# EAGLE board cpio_v0.1 (EAGLE 7.5.0)

Size 147.66 x 80 mm. Coordinates in mm from the lower left corner, seen from the top.
Outline: 112.66,0 147.66,0 147.66,80 47.66,80 47.66,30
Outline: 47.66,30 112.66,30 112.66,0
Outline: 112.66,0 47.66,0 47.66,30
Copper layers (1*16): Top 0.035mm / dielectric 1.5mm / Bottom 0.035mm
Design rules "default": minimum track width 10mil, minimum drill 0.6mm, track to track 8mil, track to pad 8mil, pad to pad 8mil, via to via 8mil, smd to smd 8mil, copper to edge 40mil, drill to drill 8mil, minimum pad ring 10mil, minimum via ring 8mil, stop-mask expansion 4mil, vias tented up to drill 0mil, thermal gap 10mil

## Footprints (pad centres in the part's own frame; a part is rotated, then mirrored left to right if it is on the bottom)
TFSOP-10 = smd 0.3 x 1.45: 1 -1,-2.2; 2 -0.5,-2.2; 3 0,-2.2; 4 0.5,-2.2; 5 1,-2.2; 6 1,2.2; 7 0.5,2.2; 8 0,2.2; 9 -0.5,2.2; 10 -1,2.2
BEEPER = drill 1: + -3.81,0; - 3.81,0
0805 = smd 0.8 x 1.2: 1 -0.9,0; 2 0.9,0
SOD-123FL = smd 0.91 x 1.22: A 1.637,0; C -1.637,0
XH-A-2 = drill 1.1: 1 1.25,0; 2 -1.25,0
SOT23-3 = smd 0.8 x 0.9: 1 -0.95,-1; 2 0.95,-1; 3 0,1.1
LED-1206 = smd 1.2 x 1.4: A -1.5,0; C 1.5,0
BUTTON = drill 1.1: 1 -2.5,-2.5; 2 2.5,-2.5; 3 -2.5,2.5; 4 2.5,2.5
PJ-047A = drill 2.236: 1 6.3,-3.3; 2 4.1,0; 3 6.3,3.3 | drill 2.53: CASE0 -1.1,3.7; CASE1 -1.1,-3.7 | hole 2.4: 0,0
WS2812B = smd 1.5 x 0.9: 1-VDD 2.45,-1.65; 2-DOUT 2.45,1.65; 3-GND -2.45,1.65; 4-DIN -2.45,-1.65
2X20 = drill 1.016 pad 1.651: 1 -24.13,-1.27; 2 -24.13,1.27; 3 -21.59,-1.27; 4 -21.59,1.27; 5 -19.05,-1.27; 6 -19.05,1.27; 7 -16.51,-1.27; 8 -16.51,1.27; 9 -13.97,-1.27; 10 -13.97,1.27; 11 -11.43,-1.27; 12 -11.43,1.27; 13 -8.89,-1.27; 14 -8.89,1.27; 15 -6.35,-1.27; 16 -6.35,1.27; 17 -3.81,-1.27; 18 -3.81,1.27; 19 -1.27,-1.27; 20 -1.27,1.27; 21 1.27,-1.27; 22 1.27,1.27; 23 3.81,-1.27; 24 3.81,1.27; 25 6.35,-1.27; 26 6.35,1.27; 27 8.89,-1.27; 28 8.89,1.27; 29 11.43,-1.27; 30 11.43,1.27; 31 13.97,-1.27; 32 13.97,1.27; 33 16.51,-1.27; 34 16.51,1.27; 35 19.05,-1.27; 36 19.05,1.27; 37 21.59,-1.27; 38 21.59,1.27; 39 24.13,-1.27; 40 24.13,1.27
XH-A-3 = drill 1.1: 1 2.5,0; 2 0,0; 3 -2.5,0
XH-A-4 = drill 1.1: 1 3.75,0; 2 1.25,0; 3 -1.25,0; 4 -3.75,0
SOT23-5 = smd 0.55 x 1.2: 1 -0.95,-1.3; 2 0,-1.3; 3 0.95,-1.3; 4 0.95,1.3; 5 -0.95,1.3
SOT23-6 = smd 0.63 x 0.8: 1 -0.95,-1.2; 2 0,-1.2; 3 0.95,-1.2; 4 0.95,1.2; 5 0,1.2; 6 -0.95,1.2
POWERSSO-24 = smd 0.6 x 1: 1 -4.4,-4.825; 2 -3.6,-4.825; 3 -2.8,-4.825; 4 -2,-4.825; 5 -1.2,-4.825; 6 -0.4,-4.825; 7 0.4,-4.825; 8 1.2,-4.825; 9 2,-4.825; 10 2.8,-4.825; 11 3.6,-4.825; 12 4.4,-4.825; 13 4.4,4.825; 14 3.6,4.825; 15 2.8,4.825; 16 2,4.825; 17 1.2,4.825; 18 0.4,4.825; 19 -0.4,4.825; 20 -1.2,4.825; 21 -2,4.825; 22 -2.8,4.825; 23 -3.6,4.825; 24 -4.4,4.825 | smd 7.1 x 4.7: PAD 0,0
TSSOP-14 = smd 1.6 x 0.35: 1 -2.8,1.9; 2 -2.8,1.25; 3 -2.8,0.6; 4 -2.8,-0.05; 5 -2.8,-0.7; 6 -2.8,-1.35; 7 -2.8,-2; 8 2.8,-1.95; 9 2.8,-1.3; 10 2.8,-0.65; 11 2.8,0; 12 2.8,0.65; 13 2.8,1.3; 14 2.8,1.95
SOT-363 = smd 0.5 x 0.5: 1 -0.9,0.75; 3 -0.9,-0.75; 4 0.9,-0.75; 6 0.9,0.75 | smd 0.5 x 0.4: 2 -0.9,0; 5 0.9,0

## Placement (x,y rotation side)
ADC  ADS1115  [TFSOP-10]  32.42,36.83 0 top
BEEP  BEEPER  [BEEPER]  56.55,40.64 0 top
C_ADC  100n  [0805]  24.8,63.5 0 top
C_ADC_B  100n  [0805]  28.61,59.69 0 top
C_ADC_PH  100n  [0805]  -22.18,55.88 0 top  (outside the outline)
C_CUR_FILT  100n  [0805]  -6.95,55.88 0 top  (outside the outline)
C_IO1  100n  [0805]  20.99,63.5 0 top
C_LDO3.3_1  1u  [0805]  -12.02,55.88 0 top  (outside the outline)
C_LDO3.3_2  1u  [0805]  -17.1,55.88 0 top  (outside the outline)
C_LVL  100n  [0805]  17.18,63.5 0 top
C_MUX  100n  [0805]  28.61,63.5 0 top
C_RL_0  100n  [0805]  -17.1,59.69 0 top  (outside the outline)
C_RL_2  100n  [0805]  -20.91,59.69 0 top  (outside the outline)
C_RL_12  100n  [0805]  5.76,59.69 0 top
C_SD_1  4.7u  [0805]  -5.68,59.69 0 top  (outside the outline)
C_SD_2  10u  [0805]  -9.48,59.69 0 top  (outside the outline)
C_SD_3  10n  [0805]  -13.3,59.69 0 top  (outside the outline)
C_SW  100n  [0805]  13.38,63.5 0 top
C_U_FILT  100n  [0805]  20.99,59.69 0 top
DIODE_SD  DB2X41100L  [SOD-123FL]  -3.13,49.53 0 top
HEAT_0  XH-A-2  [XH-A-2]  54.02,7.62 0 top
HEAT_1  XH-A-2  [XH-A-2]  64.17,7.62 0 top
HEAT_2  XH-A-2  [XH-A-2]  74.34,7.62 0 top
HEAT_3  XH-A-2  [XH-A-2]  84.5,7.62 0 top
L_SD_1  2.2u  [0805]  32.42,63.5 0 top
LDO  AP7333  [SOT23-3]  5.76,48.26 0 top
LED_PWR_3.3V  [LED-1206]  97.19,2.54 90 top
LED_PWR_5V  [LED-1206]  94.66,2.54 90 top
LED_PWR_12V  [LED-1206]  92.12,2.54 90 top
LED_RP  [LED-1206]  99.73,2.54 90 top
PUSH1  BUTTON  [BUTTON]  106.09,6.35 0 top
PWR_JACK  PJ-047A  [PJ-047A]  108.62,17.78 180 top
R_1WIRE  4.7k  [0805]  17.18,59.69 0 top
R_BEP  [0805]  4.48,66.04 0 top
R_BRIGHT  [0805]  12.1,66.04 0 top
R_CM_LOAD  100  [0805]  8.3,55.88 0 top
R_CM_LOAD1  100  [0805]  18.45,55.88 0 top
R_CM_LOAD2  100  [0805]  13.38,55.88 0 top
R_CM_SENS  1m  [0805]  3.21,55.88 0 top
R_HSS_GND  1k  [0805]  -1.87,55.88 0 top
R_HSS_PROT_0  10k  [0805]  -14.56,49.53 0 top  (outside the outline)
R_HSS_PROT_1  10k  [0805]  -20.91,49.53 0 top  (outside the outline)
R_HSS_PROT_2  10k  [0805]  29.88,55.88 0 top
R_HSS_PROT_3  10k  [0805]  23.54,55.88 0 top
R_HSS_SD  10k  [0805]  32.42,59.69 0 top
R_I2C_0  10k  [0805]  1.95,59.69 0 top
R_I2C_1  10k  [0805]  -1.87,59.69 0 top
R_LED_3.3V  [0805]  26.07,66.04 0 top
R_LED_5V  [0805]  8.3,66.04 0 top
R_LED_12V  [0805]  20.99,66.04 0 top
R_LED_RP  [0805]  15.91,66.04 0 top
R_PH  10k  [0805]  9.56,63.5 0 top
R_PUSHBUT1  [0805]  -20.91,62.23 0 top  (outside the outline)
R_PUSHBUT2  [0805]  31.15,66.04 0 top
R_SD_1B  82k  [0805]  13.38,59.69 0 top
R_SD_2A  15k  [0805]  9.56,59.69 0 top
R_SD_EN  10k  [0805]  24.8,59.69 0 top
RL_HEAT_0  WS2812B5050  [WS2812B]  84.5,2.54 0 top
RL_HEAT_1  WS2812B5050  [WS2812B]  74.34,2.54 0 top
RL_HEAT_2  WS2812B5050  [WS2812B]  64.17,2.54 0 top
RL_HEAT_3  WS2812B5050  [WS2812B]  54.02,2.54 0 top
RP_HEAD  M20X2  [2X20]  80.16,26.5 0 top
SENS_BRIGHT  XH-A-3  [XH-A-3]  75.61,20.32 0 top
SENS_HUM_0  XH-A-4  [XH-A-4]  54.02,20.32 0 top
SENS_HUM_1  XH-A-4  [XH-A-4]  87.03,20.32 0 top
SENS_I  INA139  [SOT23-5]  9.56,49.53 0 top
SENS_PH  XH-A-3  [XH-A-3]  65.44,20.32 0 top
SENS_TEMP_0  XH-A-3  [XH-A-3]  54.02,13.97 0 top
SENS_TEMP_1  XH-A-3  [XH-A-3]  64.17,13.97 0 top
SENS_TEMP_2  XH-A-3  [XH-A-3]  74.34,13.97 0 top
SENS_TEMP_3  XH-A-3  [XH-A-3]  84.5,13.97 0 top
STP_DN  AOZ1280  [SOT23-6]  1.95,49.53 0 top
SWT_HEAT  VNQ5E160K-E  [POWERSSO-24]  94.66,12.7 0 bottom
SWT_SENS  74CBTLV3125  [TSSOP-14]  15.91,49.53 0 top
U$1  74LVC  [SOT-363]  0.67,66.04 0 top
U$2  DB2X41100L  [SOD-123FL]  -8.22,49.53 0 top  (outside the outline)

## Library data of the parts
ADC BEEP DIODE_SD HEAT_0 HEAT_1-HEAT_3 LDO PUSH1 PWR_JACK SENS_BRIGHT SENS_HUM_0 SENS_HUM_1 SENS_I SENS_PH SENS_TEMP_0 SENS_TEMP_1-SENS_TEMP_3 STP_DN SWT_HEAT SWT_SENS U$1 U$2 = cpio
C_ADC C_ADC_B C_ADC_PH C_CUR_FILT C_IO1 C_LDO3.3_1 C_LDO3.3_2 C_LVL C_MUX C_RL_0 C_RL_2 C_RL_12 C_SD_1-C_SD_3 C_SW C_U_FILT L_SD_1 R_1WIRE R_BEP R_BRIGHT R_CM_LOAD R_CM_LOAD1 R_CM_LOAD2 R_CM_SENS R_HSS_GND R_HSS_PROT_0 R_HSS_PROT_1-R_HSS_PROT_3 R_HSS_SD R_I2C_0 R_I2C_1 R_LED_3.3V R_LED_5V R_LED_12V R_LED_RP R_PH R_PUSHBUT1 R_PUSHBUT2 R_SD_1B R_SD_2A R_SD_EN = SparkFun-Passives
LED_PWR_3.3V LED_PWR_5V LED_PWR_12V LED_RP = SparkFun-LED
RL_HEAT_0 RL_HEAT_1-RL_HEAT_3 = adafruit
RP_HEAD = SparkFun-Connectors

## Nets
1WIRE: SENS_TEMP_0.2 SENS_TEMP_1.2 SENS_TEMP_2.2 SENS_TEMP_3.2
3.3V: ADC.8 C_ADC.2 C_IO1.1 C_LDO3.3_2.1 LDO.2 R_1WIRE.2 R_BEP.2 R_HSS_SD.2 R_I2C_0.2 R_I2C_1.2 R_LED_3.3V.2 R_PUSHBUT1.2 SENS_BRIGHT.1 SENS_HUM_0.1 SENS_HUM_1.1 SENS_PH.1 SWT_SENS.2 SWT_SENS.5 SWT_SENS.9 SWT_SENS.12 SWT_SENS.14 U$1.1 U$1.5
3.3V1: C_MUX.2
3.3V2: C_SW.2
3.3V3: C_LVL.2
5V: C_LDO3.3_1.1 C_RL_0.1 C_RL_2.1 C_SD_2.1 L_SD_1.2 LDO.1 R_LED_5V.2 R_SD_1B.2 RL_HEAT_0.1-VDD RL_HEAT_1.1-VDD RL_HEAT_2.1-VDD RL_HEAT_3.1-VDD RP_HEAD.2 RP_HEAD.4 U$1.6
12V: C_SD_1.1 R_CM_LOAD1.2 R_CM_SENS.2 R_LED_12V.2 R_SD_EN.2 SENS_I.4 STP_DN.5 SWT_HEAT.1 SWT_HEAT.12
+3V3: SENS_I.5
ADC_BRIGHT: ADC.6 C_ADC_B.1 R_BRIGHT.1
ADC_CUR: ADC.4 C_CUR_FILT.1 R_CM_LOAD.2 SENS_I.1
ADC_PH: ADC.7 C_ADC_PH.1 R_PH.1
ADC_U: ADC.5 C_U_FILT.1 R_CM_LOAD1.1 R_CM_LOAD2.2
GND: ADC.1 ADC.3 C_ADC.1 C_ADC_B.2 C_ADC_PH.2 C_IO1.2 C_LDO3.3_1.2 C_LDO3.3_2.2 C_LVL.1 C_MUX.1 C_RL_0.2 C_RL_2.2 C_RL_12.2 C_SD_1.2 C_SD_2.2 C_SW.1 C_U_FILT.2 DIODE_SD.A HEAT_0.2 HEAT_1.2 HEAT_2.2 HEAT_3.2 LDO.3 LED_PWR_3.3V.C LED_PWR_5V.C LED_PWR_12V.C LED_RP.C PUSH1.1 PUSH1.3 PWR_JACK.2 PWR_JACK.3 PWR_JACK.CASE0 PWR_JACK.CASE1 R_CM_LOAD2.1 R_CM_LOAD.1 R_HSS_GND.2 R_SD_2A.1 RL_HEAT_0.3-GND RL_HEAT_1.3-GND RL_HEAT_2.3-GND RL_HEAT_3.3-GND RP_HEAD.6 RP_HEAD.14 RP_HEAD.20 RP_HEAD.30 RP_HEAD.34 SENS_BRIGHT.3 SENS_HUM_0.4 SENS_HUM_1.4 SENS_I.2 SENS_PH.3 SENS_TEMP_0.3 SENS_TEMP_1.3 SENS_TEMP_2.3 SENS_TEMP_3.3 STP_DN.2 SWT_SENS.7 U$1.2
GPIO4: R_1WIRE.1
GPIO12: RP_HEAD.32 SWT_SENS.10
GPIO13: R_HSS_PROT_0.1
GPIO16: RP_HEAD.36 SWT_SENS.4
GPIO17: BEEP.-
GPIO19: R_HSS_PROT_1.1
GPIO20: RP_HEAD.38 SWT_SENS.1
GPIO21: R_HSS_PROT_3.1 RP_HEAD.40
GPIO23: RP_HEAD.16
GPIO24: RP_HEAD.18
GPIO25: RP_HEAD.22 SWT_SENS.13
GPIO26: R_HSS_PROT_2.1
GPIO27: C_RL_12.1 R_PUSHBUT1.1 R_PUSHBUT2.2
I2C_SCL: ADC.10 R_I2C_0.1 SENS_HUM_0.2 SENS_HUM_1.2
I2C_SDA: ADC.9 R_I2C_1.1 SENS_HUM_0.3 SENS_HUM_1.3
ID_SC: RP_HEAD.28
N$1: RP_HEAD.3 RP_HEAD.5 RP_HEAD.7 RP_HEAD.9 RP_HEAD.11 RP_HEAD.13 RP_HEAD.15 RP_HEAD.19 RP_HEAD.21 RP_HEAD.23 RP_HEAD.25 RP_HEAD.27 RP_HEAD.29 RP_HEAD.31 RP_HEAD.33 RP_HEAD.35 RP_HEAD.37 RP_HEAD.39
N$2: LED_PWR_12V.A R_LED_12V.1
N$3: PWR_JACK.1
N$4: R_HSS_GND.1 SWT_HEAT.2 SWT_HEAT.PAD
N$5: PUSH1.2 PUSH1.4 R_PUSHBUT2.1
N$6: R_SD_EN.1 STP_DN.4
N$7: R_PH.2 SENS_PH.2
N$8: C_SD_3.1 STP_DN.1
N$9: R_SD_1B.1
N$10: C_SD_3.2 DIODE_SD.C L_SD_1.1 STP_DN.6
N$11: LED_PWR_5V.A R_LED_5V.1
N$12: STP_DN.3
N$13: R_SD_2A.2
N$15: LED_PWR_3.3V.A R_LED_3.3V.1
N$16: SENS_TEMP_1.1 SWT_SENS.6
N$17: SENS_TEMP_0.1 SWT_SENS.3
N$18: SENS_TEMP_2.1 SWT_SENS.8
N$19: SENS_TEMP_3.1 SWT_SENS.11
N$20: LED_RP.A R_LED_RP.1
N$23: U$2.A
N$24: R_CM_SENS.1 SENS_I.3 U$2.C
N$26: HEAT_2.1 SWT_HEAT.16 SWT_HEAT.17 SWT_HEAT.18
N$27: HEAT_1.1 SWT_HEAT.19 SWT_HEAT.20 SWT_HEAT.21
N$28: HEAT_0.1 SWT_HEAT.22 SWT_HEAT.23 SWT_HEAT.24
N$29: HEAT_3.1 SWT_HEAT.13 SWT_HEAT.14 SWT_HEAT.15
N$30: R_HSS_SD.1 SWT_HEAT.11
N$31: R_HSS_PROT_3.2 SWT_HEAT.9
N$32: R_HSS_PROT_2.2 SWT_HEAT.7
N$33: R_HSS_PROT_1.2 SWT_HEAT.5
N$34: R_HSS_PROT_0.2 SWT_HEAT.3
N$35: R_BRIGHT.2 SENS_BRIGHT.2
N$43: RL_HEAT_2.2-DOUT RL_HEAT_3.4-DIN
N$44: RL_HEAT_1.2-DOUT RL_HEAT_2.4-DIN
N$45: RL_HEAT_0.2-DOUT RL_HEAT_1.4-DIN
N$53: RL_HEAT_0.4-DIN U$1.4
N$64: BEEP.+ R_BEP.1
PI_3.3V: R_LED_RP.2 RP_HEAD.1 RP_HEAD.17
PWM0: RP_HEAD.12 U$1.3
SPI0_CE0_N: RP_HEAD.24
SPI0_CE1_N: RP_HEAD.26
UART0_RX: RP_HEAD.10
UART0_TX: RP_HEAD.8

## Tracks (layer width: path | path; a pad name or v marks a point on that pad's centre or on a via)
1WIRE  (3 unrouted)
3.3V  (22 unrouted)
5V  (14 unrouted)
12V  (8 unrouted)
ADC_BRIGHT  (2 unrouted)
ADC_CUR  (3 unrouted)
ADC_PH  (2 unrouted)
ADC_U  (3 unrouted)
GND  (57 unrouted)
GPIO12  (1 unrouted)
GPIO16  (1 unrouted)
GPIO20  (1 unrouted)
GPIO21  (1 unrouted)
GPIO25  (1 unrouted)
GPIO27  (2 unrouted)
I2C_SCL  (3 unrouted)
I2C_SDA  (3 unrouted)
N$1  (17 unrouted)
N$2  (1 unrouted)
N$4  (2 unrouted)
N$5  (2 unrouted)
N$6  (1 unrouted)
N$7  (1 unrouted)
N$8  (1 unrouted)
N$10  (3 unrouted)
N$11  (1 unrouted)
N$15  (1 unrouted)
N$16  (1 unrouted)
N$17  (1 unrouted)
N$18  (1 unrouted)
N$19  (1 unrouted)
N$20  (1 unrouted)
N$24  (2 unrouted)
N$26  (3 unrouted)
N$27  (3 unrouted)
N$28  (3 unrouted)
N$29  (3 unrouted)
N$30  (1 unrouted)
N$31  (1 unrouted)
N$32  (1 unrouted)
N$33  (1 unrouted)
N$34  (1 unrouted)
N$35  (1 unrouted)
N$43  (1 unrouted)
N$44  (1 unrouted)
N$45  (1 unrouted)
N$53  (1 unrouted)
N$64  (1 unrouted)
PI_3.3V  (2 unrouted)
PWM0  (1 unrouted)